# Altium PCB MiniCar.PcbDoc
Units mil, origin at the board's own origin, x right, y up, seen from the top; angles counter-clockwise.
Board outline 826.77 x 708.66 mil, 2 copper layers (Top Layer, Bottom Layer); 25 components, 26 nets, 90 pads, 43 vias.
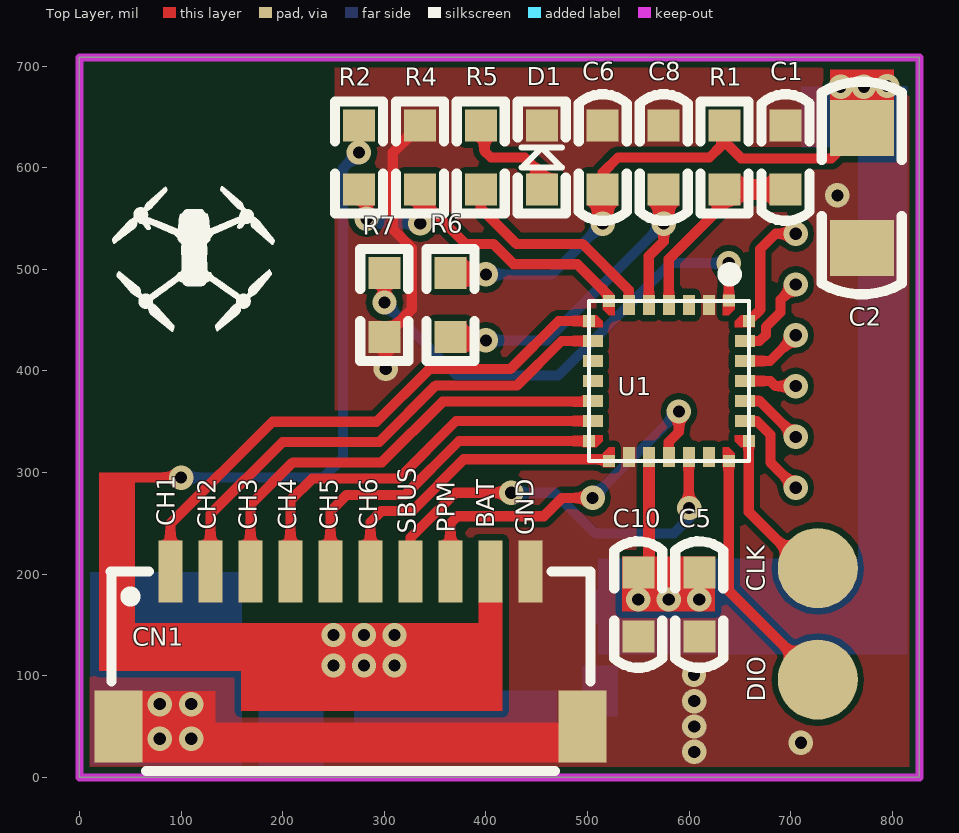
[diagram p0: Top Layer view]
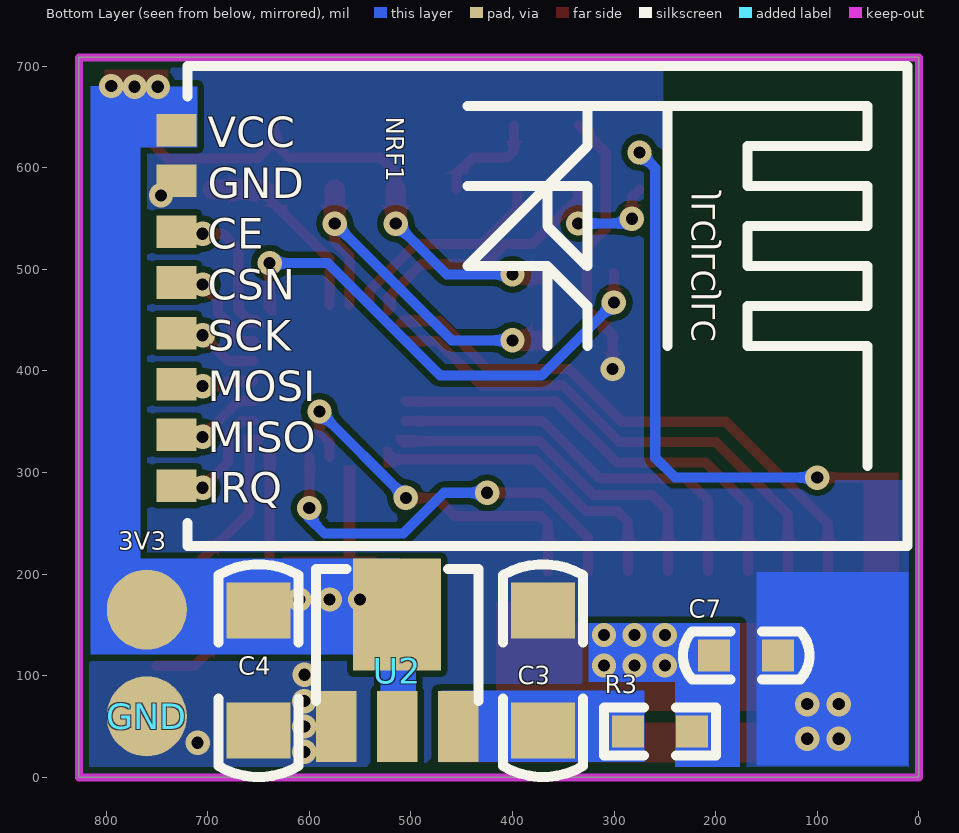
[diagram p1: Bottom Layer view, seen from below]
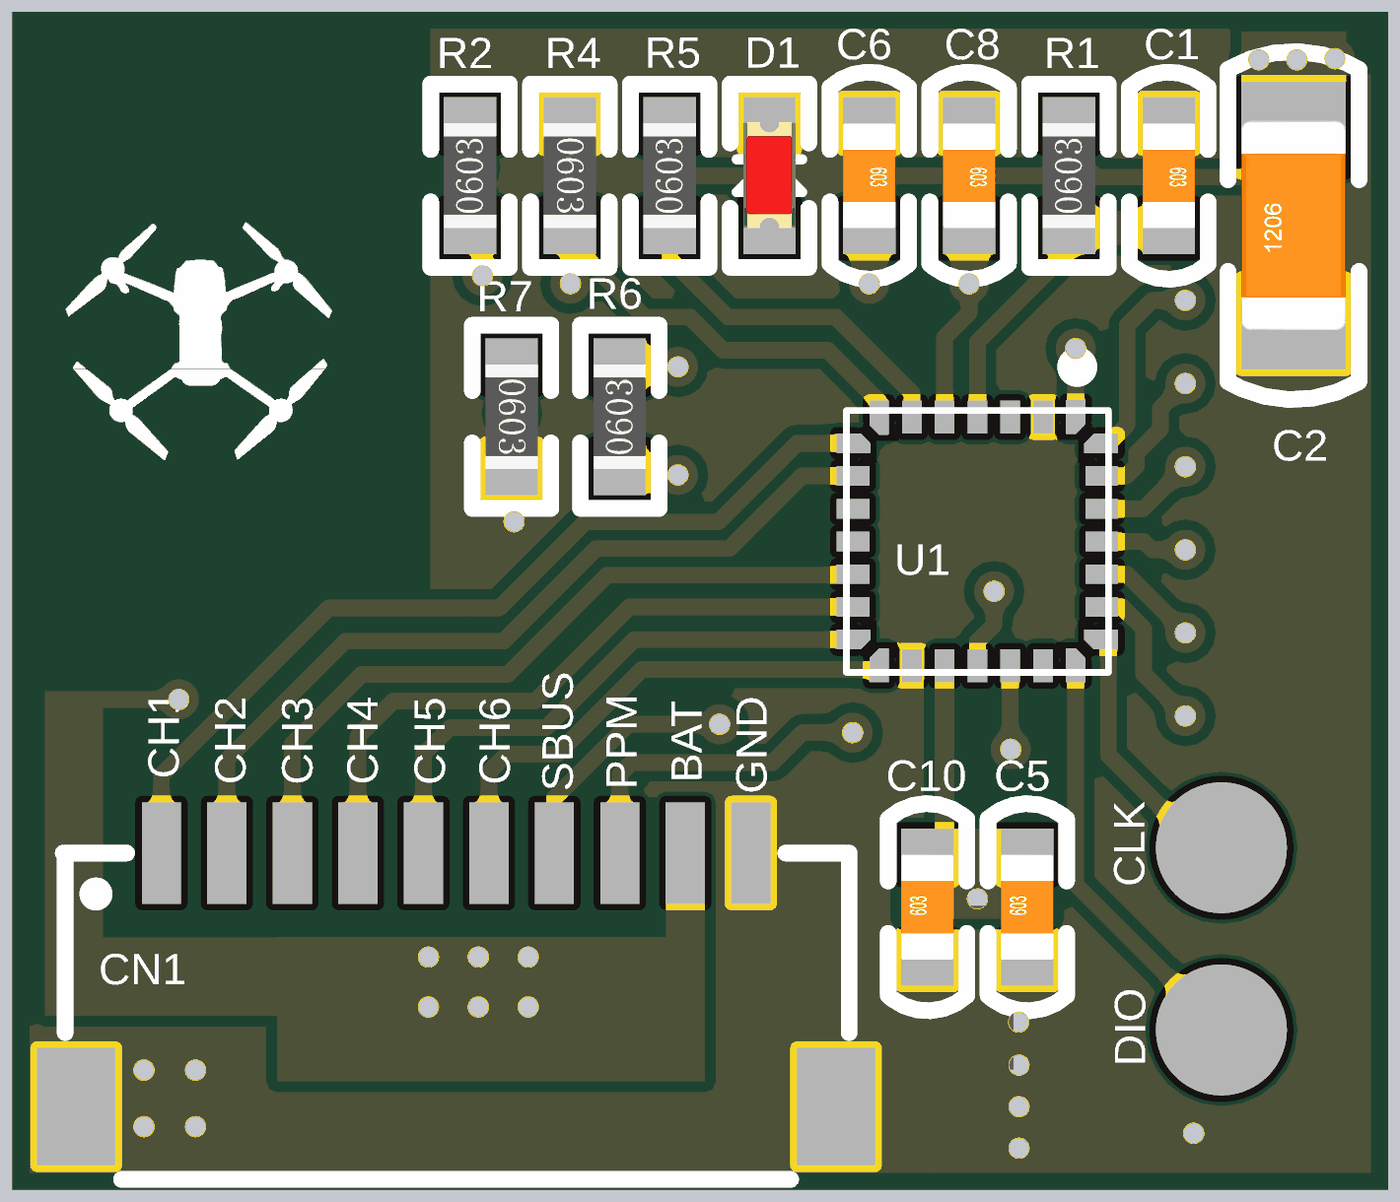
[diagram p2: 3D render of the assembled board from above, using the file's embedded part models]
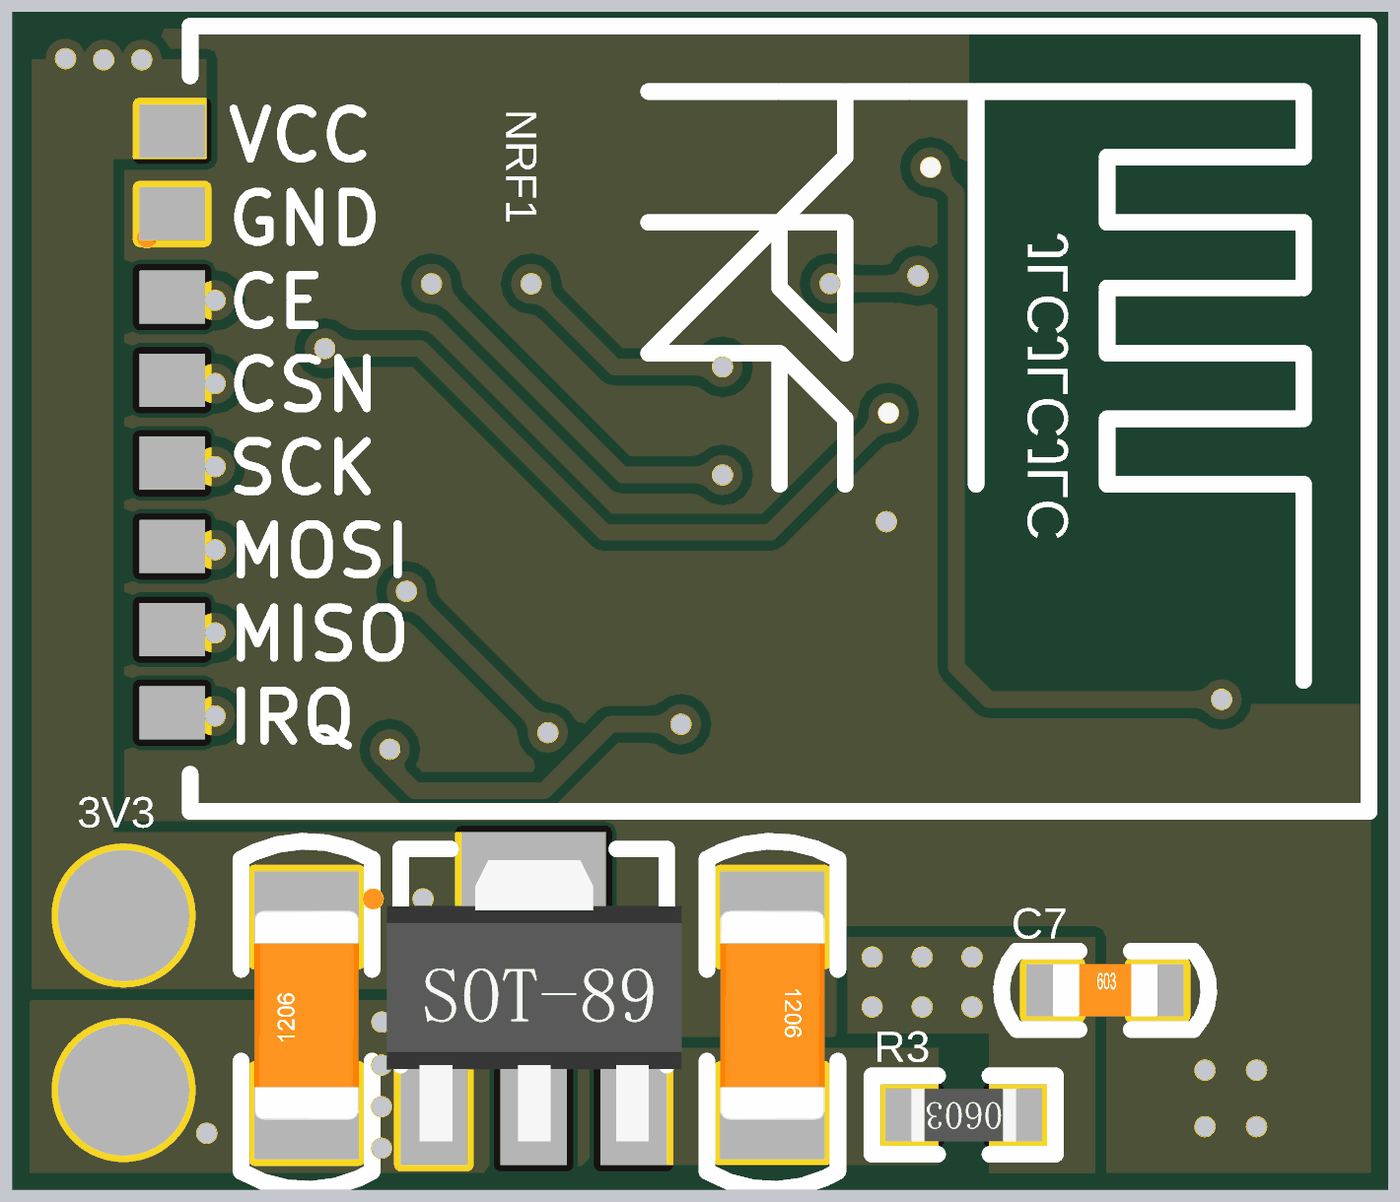
[diagram p3: 3D render of the assembled board from below, using the file's embedded part models]

## Layer stack, top to bottom
Top Solder: solder mask 0.4, Solder Resist, Dk 3.5
Top Layer: signal copper 1.4
Dielectric 1: dielectric 12.6, FR-4, Dk 4.8
Bottom Layer: signal copper 1.4
Bottom Solder: solder mask 0.4, Solder Resist, Dk 3.5

## Board outline
0,0 826.77,0 826.77,708.66 0,708.66

## Design rules (kind name [scope] priority, off if disabled: settings)
Clearance [All] p1: gap=6 ignorepadtopadclearanceinfootprint=FALSE except(0: Arc-Hole Track-Hole SMDPad-Hole THPad-Hole Via-Hole Fill-Hole Poly-Hole Region-Hole Text-Hole)
HoleSize [All] p1 off: absolutevalues=TRUE maxlimit=100 minlimit=1 maxpercent=80.000 minpercent=20.000
HoleToHoleClearance [All] p1 off: gap=10 allowstackedmicrovias=TRUE
LayerPairs [All] p1 off: enforce=TRUE
MinimumSolderMaskSliver [All] p1 off: minsoldermaskwidth=10
NetAntennae [All] p1 off: netantennaetolerance=0
PlaneConnect [All] p1: planeconnectstyle=Direct reliefexpansion=20 reliefentries=4 reliefconductorwidth=10 reliefairgap=10
PolygonConnect [All] p1: connectstyle=Direct reliefconductorwidth=10 reliefentries=4 polygonreliefangle="90 Angle" airgapwidth=10
RoutingVias [All] p1: holewidth=28 width=50 viastyle="Through Hole" minholewidth=28 minwidth=50 maxholewidth=28 maxwidth=50
SilkToSilkClearance [All] p1 off: silktosilkclearance=10
SilkToSolderMaskClearance [IsPad] p1 off: minsilkscreentomaskgap=10 clearancetoexposedcopper=TRUE
SolderMaskExpansion [All] p1: expansion=3.94
Width [All] p1: maxlimit=100 minlimit=6 preferedwidth=6
22 further rules are at their usual default settings.

## Components (designator, comment, footprint, x,y, rotation, side; value= is the part's Value field where it differs from the comment)
3V3 "3V3" Pad_B 760,165 r180 bottom
C1 "104" 电容_C0603 695,610 r270 top
C2 "22uF" 电容_C1206 770,580 r90 top
C3 "22uF" 电容_C1206 370,105 r270 bottom
C4 "22uF" 电容_C1206 650,105 r90 bottom
C5 "1uF" 电容_C0603 610,170 r90 top
C6 "1uF" 电容_C0603 515,610 r270 top
C7 "0.1uF" 电容_C0603 170,120 r180 bottom
C8 "10nF" 电容_C0603 575,610 r270 top
C10 "100nF" 电容_C0603 550,170 r90 top
CLK "CLK" Pad_B 726.65,205.78 r90 top
CN1 "SM10B-SRSS-TB (LF)(SN)" CONN-SMD_10P-P1.00_SM10B-SRSS-TB(LF)(SN) 266.64,126.29 r0 top
D1 "red" LED_0603 455,610 r90 top
DIO "DIO" Pad_B 726.65,96.16 r90 top
GND "GND" Pad_B 760,60 r90 bottom
NRF1 "NRF_1" NRF-1 720,700 r270 bottom
R1 "10K" 电阻_R0603 635,610 r90 top
R2 "10K" 电阻_R0603 275,610 r90 top
R3 "1R" 电阻_R0603 255,45 r0 bottom
R4 "10K" 电阻_R0603 335,610 r270 top
R5 "100" 电阻_R0603 395,610 r90 top
R6 "1" 电阻_R0603 365,465 r90 top
R7 "10K" 电阻_R0603 300,465 r270 top
U1 "STM32F031G6U6" ST主控_UFQFPN28 580,390 r270 top
U2 "AMS1117" 稳压芯片_SOT-89 573.5,50 r180 bottom

## Footprints (in the part's own frame and the unit in brackets; to place one, negate y for a bottom-side part, rotate by r counter-clockwise, add the part's x,y. Pads: shape width x height; smd on the part's side, far side on the other; paste and mask are expansions set on the pad)
CONN-SMD_10P-P1.00_SM10B-SRSS-TB(LF)(SN) [mm]
  rect 0.6x1.55 smd: 1(-4.5,1.938) 2(-3.5,1.938) 3(-2.5,1.937) 4(-1.5,1.937) 5(-0.5,1.937) 6(0.5,1.937) 7(1.5,1.937) 8(2.5,1.937) 9(3.5,1.937) 10(4.5,1.937)
  rect 1.2x1.8 smd: 11(5.8,-1.938) 12(-5.8,-1.938)
  silkscreen extent -6,-3.05 6,1.94
LED_0603 [mm]
  rect 0.8x0.8 smd: A(-0.8,0) K(0.8,0)
  silkscreen extent -1.4,-0.6 1.4,0.6, body extent -0.8,-0.4 0.82,0.4, height 0.6
NRF-1 [mm]
  rect 0.813x1 smd: 1(1.6,-0.275) 2(2.87,-0.275) 3(4.14,-0.275) 4(5.41,-0.275) 5(6.68,-0.275) 6(7.95,-0.275) 7(9.22,-0.275) 8(10.49,-0.275)
  silkscreen extent 0,0 12,18
Pad_B [mm]
  round 2 smd: 1(0,0)
ST主控_UFQFPN28 [mm]
  rect 0.3x0.3 smd: 1(-2.01,1.5) 7(-2,-1.5) 8(-1.5,-2) 14(1.5,-2) 15(2,-1.5) 21(2,1.5) 22(1.5,2) 28(-1.5,2)
  rect 0.5x0.3 smd: 2(-1.9,1) 3(-1.9,0.5) 4(-1.9,0) 5(-1.9,-0.5) 6(-1.9,-1) 16(1.9,-1) 17(1.9,-0.5) 18(1.9,0) 19(1.9,0.5) 20(1.9,1)
  rect 0.3x0.5 smd: 9(-1,-1.9) 10(-0.5,-1.9) 11(0,-1.9) 12(0.5,-1.9) 13(1,-1.9) 23(1,1.9) 24(0.5,1.9) 25(0,1.9) 26(-0.5,1.9) 27(-1,1.9)
  Top Layer region: 1.65,1.35 1.65,1.5 1.8,1.65 2.15,1.65 2.15,1.35 1.65,1.35
  Top Layer region: 1.35,1.65 1.5,1.65 1.65,1.8 1.65,2.15 1.35,2.15 1.35,1.65
  Top Layer region: -1.35,1.65 -1.5,1.65 -1.65,1.8 -1.65,2.15 -1.35,2.15 -1.35,1.65
  Top Layer region: -1.65,1.35 -1.65,1.5 -1.8,1.65 -2.15,1.65 -2.15,1.35 -1.65,1.35
  Top Layer region: 1.65,-1.35 1.65,-1.5 1.8,-1.65 2.15,-1.65 2.15,-1.35 1.65,-1.35
  Top Layer region: 1.35,-1.65 1.5,-1.65 1.65,-1.8 1.65,-2.15 1.35,-2.15 1.35,-1.65
  Top Layer region: -1.35,-2.15 -1.351,-1.65 -1.501,-1.65 -1.651,-1.801 -1.65,-2.151 -1.35,-2.15
  Top Layer region: -2.15,-1.35 -1.65,-1.35 -1.65,-1.5 -1.8,-1.65 -2.15,-1.65 -2.15,-1.35
  silkscreen extent -2.82,-2 2,2
电容_C0603 [mm]
  rect 0.8x0.8 smd: 1(-0.8,0) 2(0.8,0)
  silkscreen extent -1.58,-0.6 1.58,0.6, body extent -0.8,-0.4 0.8,0.4, height 0.3
电容_C1206 [mm]
  rect 1.4x1.6 smd: 1(-1.5,0) 2(1.5,0)
  silkscreen extent -2.66,-1 2.66,1, body extent -1.6,-0.8 1.6,0.8, height 1
电阻_R0603 [mm]
  rect 0.8x0.8 smd: 1(-0.8,0) 2(0.8,0)
  silkscreen extent -1.4,-0.6 1.4,0.6, body extent -0.8,-0.4 0.8,0.4, height 0.45
稳压芯片_SOT-89 [mil]
  rect 40x70 smd: 1(0,0) 2(60,0) 3(120,0)
  rect 86.61x110.24 smd: 2(60,110)
  silkscreen extent -20,25 140,155, body extent -28,-21 149,148, height 59

## Part data
3V3 CLK DIO GND: library part Pad, _Comma=,, _Funcyusa=Test, _Name=Pad
  3V3: _Remarks=3V3, _Specification=Pad,Test,3V3
  CLK: _Remarks=CLK, _Specification=Pad,Test,CLK
  DIO: _Remarks=DIO, _Specification=Pad,Test,DIO
  GND: _Remarks=GND, _Specification=Pad,Test,GND
C1 C2 C3 C4 C5 C6 C7 C8 C10: library part cap, U=50V, 参数=Cap,0805,X7R,104K,50V,125C,±10%
  C1: C=104
  C2 C3 C4: C=22uF
  C5 C6: C=1uF
  C7: C=0.1uF
  C8: C=10nF
  C10: C=100nF
CN1: BOM_Manufacturer="JST Sales America", BOM_Manufacturer Part="SM10B-SRSS-TB (LF)(SN)", BOM_Supplier=LCSC, BOM_Supplier Part=C160409, Contributor=LCSC, spicePre=C, spiceSymbolName="SM10B-SRSS-TB (LF)(SN)"
D1: library part LED, 参数=LED,0603,Red
R1 R2 R3 R4 R5 R6 R7: library part Res, P=1/8W, 参数=Res,0805,0R,±1%,1/8W,100ppm,155C
  R1 R2 R4 R7: R=10K
  R3: R=1R
  R5: R=100
  R6: R=1

## Via types
v1: diameter 24, hole 12, Top Layer to Bottom Layer, tented both sides, 43 vias

## Nets (pads, with @x,y where several pads share a name; then routed paths per layer and width w, separated by ;. In a path a pad name is that pad's centre, name@x,y a point inside that pad or via, vN(x,y) a via of type N, cw(c..) or ccw(c..) an arc to the next point about the centre after c; other vN are vias at no path point)
3V3: 3V3.1 C2.2 C4.2 C5.2 C6.2 C10.2 NRF1.1 R1.2 R6.2 U1.17 U2.2 | length 545.4
  Top Layer w10: C6.2 515,595 530,610 620,610 631.5,621.5 R1.2@631.5,631.5 ; R1.2 635,625.6 651.4,609.2 740.14,609.2 C2.2
  Top Layer w20: R6.2 366.5,495 v1(400,495) ; v1(515,545) C6.2
  Bottom Layer w10: v1(400,495) 465,495 v1(515,545)
  Bottom Layer w20: U2.2@513.5,160 U2.2@513.5,176.5
  other v1: 550,175 580,175 610,175 749.12,679.76 772.01,679.76 794.89,680.41
3V3VA: C8.2 R6.1 U1.5 | length 378.9
  Top Layer w10: R6.1 R6.1@368.5,430 ; U1.5 560.32,512.94 575,527.63 v1(575,545)
  Top Layer w20: R6.1@368.5,430 v1(400,430) ; v1(575,545) C8.2
  Bottom Layer w10: v1(400,430) 460,430 v1(575,545)
BAT: C7.1 CN1.9 R2.2 R3.1 | length 528.3
  Top Layer w10: 50,295 v1(100,295) ; 119.3,142.4 120.5,143.6
  Bottom Layer w10: v1(100,295) 240,295 259.51,314.51 259.51,599.51 v1(275,615)
  Bottom Layer w20: R3.1 R3.1@225,46.5
  other v1: 250,110 280,110 310,110 250,140 280,140 310,140
BAT_DET: R2.1 R4.2 U1.7 | length 359.1
  Top Layer w10: R2.1 282.51,570.99 v1(282.51,549.82) ; R4.2@326.5,578.5 R4.2 335.33,578.17 R4.2@335.33,569.67 ; v1(335.33,545.1) R4.2@335.33,569.67 ; U1.7 520.94,474.06 490,505 427.37,505 407.37,525 380,525 R4.2@335.33,569.67
  Bottom Layer w10: v1(282.51,549.82) 287.23,545.1 v1(335.33,545.1)
CH1: CN1.1 U1.8 | length 541.3
  Top Layer w10: CN1.1 89.48,249.48 190,350 292.37,350 344.13,401.76 424.13,401.76 471.43,449.06 U1.8
CH2: CN1.2 U1.9 | length 503.2
  Top Layer w10: CN1.2 128.85,258.85 200,330 295,330 350.76,385.76 430.76,385.76 474.37,429.37 U1.9
CH3: CN1.3 U1.12 | length 444.9
  Top Layer w10: CN1.3 168.23,268.23 210,310 297.63,310 357.38,369.76 504.64,369.76 U1.12
CH4: CN1.4 U1.13 | length 400
  Top Layer w10: CN1.4 207.59,272.59 229,294 314,294 370.63,350.63 U1.13
CH5: CN1.5 U1.14 | length 342.3
  Top Layer w10: CN1.5 246.97,261.97 263,278 320.63,278 373.57,330.94 U1.14
CH6: CN1.6 U1.15 | length 309.6
  Top Layer w10: CN1.6 286.34,251.34 297,262 327.25,262 378.25,313 519.2,313 U1.15
GND: C1.1 C2.1 C3.1 C4.1 C5.1 C6.1 C7.2 C8.1 C10.1 CN1.10 CN1.11 CN1.12 D1.K GND.1 NRF1.2 R4.1 R7.2 U1.2 U1.16 U2.1 | length 270.3
  Top Layer w10: v1(301.48,401.89) 301.48,432.02 R7.2 327.01,460.51 327.01,520.89 308.25,539.65 308.25,614.75 R4.1
  other v1: 605,25 710,34 79,38 110,38 605,50 79,72 110,72 605,75 604.8,100.9 745.95,572.73
LED: R5.1 U1.6 | length 212.1
  Top Layer w10: R5.1 395,560 430,525 495,525 540.63,479.37 U1.6
NetC3_2: C3.2 R3.2 U2.3
NetD1_A: D1.A R5.2 | length 106
  Top Layer w10: R5.2@398.5,641.5 398.5,616.5 405,610 438.5,610 455,593.5 D1.A
NetR7_1: R7.1 U1.1 | length 480.9
  Top Layer w10: R7.1 300,467.5 v1(300.2,467.3) ; U1.1 v1(639.06,506.04)
  Bottom Layer w10: v1(300.2,467.3) 300.2,466.7 371.4,395.5 471.1,395.5 581.64,506.04 v1(639.06,506.04)
NRF_CE: NRF1.3 U1.28 | length 116.8
  Top Layer w10: U1.28 670,460.31 670,520 685,535 v1(705,535)
NRF_CSN: NRF1.4 U1.27 | length 85
  Top Layer w10: U1.27 669.37,429.37 675.65,435.65 675.65,443.33 690,457.69 690,470 v1(705,485)
NRF_IRQ: NRF1.8 U1.23 | length 93.4
  Top Layer w10: U1.23 666.74,350.63 680,337.37 680,310 v1(705,285)
NRF_MISO: NRF1.7 U1.24 | length 64.8
  Top Layer w10: U1.24 669.68,370.32 v1(705,335)
NRF_MOSI: NRF1.6 U1.25 | length 52.3
  Top Layer w10: U1.25 680,390 685,385 v1(705,385)
NRF_SCK: NRF1.5 U1.26 | length 60.7
  Top Layer w10: U1.26 679.68,409.68 v1(705,435)
NRST: C1.2 R1.1 U1.4 | length 200.6
  Top Layer w10: U1.4 580,510 645,575 645,578.5 R1.1
  Top Layer w20: R1.1@645,578.5 C1.2
PPM: CN1.8 U1.18 | length 366.9
  Top Layer w10: CN1.8 365.08,250.08 372,257 457,257 475,275 v1(505,275) ; U1.18 580,330 590,340 v1(590,360)
  Bottom Layer w10: v1(505,275) v1(590,360)
SBUS: CN1.7 U1.19 | length 408.9
  Top Layer w10: CN1.7 325.71,235.71 370,280 v1(425,280) ; U1.19 599.68,265.32 v1(600,265)
  Bottom Layer w10: v1(425,280) 467.47,280 507.47,240 585,240 600,255 v1(600,265)
SWCLK: CLK.1 U1.22 | length 197.8
  Top Layer w10: U1.22 658.74,261.33 723.81,196.26 CLK.1@760,196.26
SWDIO: DIO.1 U1.21 | length 269.3
  Top Layer w10: U1.21 639.06,183.75 713,109.81 DIO.1@750.25,109.81
pads on no net: U1.3 U1.10 U1.11 U1.20

## Polygon pours and split planes (outlines as drawn)
GND on Top Layer "GND_L01_P022" (solid, remove dead copper, pour order 22): 0,0 826.77,0 826.77,708.66 0,708.66
GND on Bottom Layer "GND_L02_P024" (solid, remove dead copper, pour order 24): 0,0 826.77,0 826.77,708.66 0,708.66

## Keep-outs
Keep-Out Layer:
  the board outline again, w7.87

## Other copper
Top Layer:
  rectangle net 3V3: 738.65,666.56 801.59,696.75
  rectangle net GND: 111.63,14.45 471.74,53.92
  rectangle net GND: 59,14.5 134,85
  rectangle net 3V3: 554.4,211.5 566.2,307
  rectangle net 3V3: 534,163 625.7,217.3
  rectangle net 3V3: 560,190 610,215
  rectangle net BAT: 19.4,104.6 239.65,151.7
  rectangle net BAT: 19.4,151.7 54.5,300.1
  rectangle net BAT: 392.7,65.18 416.3,172.5
  rectangle net BAT: 159,65.13 416.3,152
  pour cut-out: 0,708.66 249.07,708.66 251.03,706.7 251.03,294.07 0.22,294.07 -0.56,294.85 1.97,297.38 1.97,706.36
Bottom Layer:
  rectangle net BAT: 239,94 325,152
  rectangle net BAT: 176,10 240,152
  rectangle net 3V3: 510.5,120.8 815.2,215.2
  rectangle net 3V3: 495,60 530,110
  rectangle net NetC3_2: 270,15 470,85.48
  rectangle net 3V3: 710,620 800,680
  rectangle net GND: 10.3,11.4 160,201.89
  rectangle net 3V3: 766.1,127.2 815.2,680.2
  pour cut-out: 0.13,708.53 0.36,709.02 251.84,709.02 251.84,295.94 248.23,292.33 0.13,292.39

## Silkscreen, mask and mechanical layers (free items; w line width, h text height)
Top Overlay:
  drawing of 1835 lines, arcs and shapes, not listed
  text "CH1" at 99.9,247.33 h30 r90
  text "BAT" at 414.25,244.98 h30 r90
  text "CH2" at 139.98,243.83 h30 r90
  text "CH3" at 180.23,243.63 h30 r90
  text "CH4" at 219.44,243.71 h30 r90
  text "CH6" at 298.89,243.63 h30 r90
  text "CH5" at 259.86,243.5 h30 r90
  text "PPM" at 375.1,240.91 h30 r90
  text "SBUS" at 336.71,239.73 h30 r90
  text "GND" at 453.23,238.25 h30 r90
Bottom Overlay:
  text "JLCJLCJLC" at 192.57,575.74 h39.37 r270
Mechanical 1:
  the board outline again, w7.87

## Text inside footprints (layer, text, board x,y; h text height)
NRF1: Bottom Overlay "IRQ" at 700,270 h30; Bottom Overlay "MISO" at 700,320 h30; Bottom Overlay "MOSI" at 700,370 h30; Bottom Overlay "SCK" at 700,420 h30; Bottom Overlay "CSN" at 700,470 h30; Bottom Overlay "CE" at 700,520 h30; Bottom Overlay "GND" at 700,570 h30; Bottom Overlay "VCC" at 700,620 h30